# Altium PCB PCB1.PcbDoc
Units mil, origin at the board's own origin, x right, y up, seen from the top; angles counter-clockwise.
Board outline 3325 x 1920 mil, 2 copper layers (Top Layer, Bottom Layer); 20 components, 20 nets, 60 pads, 0 vias.
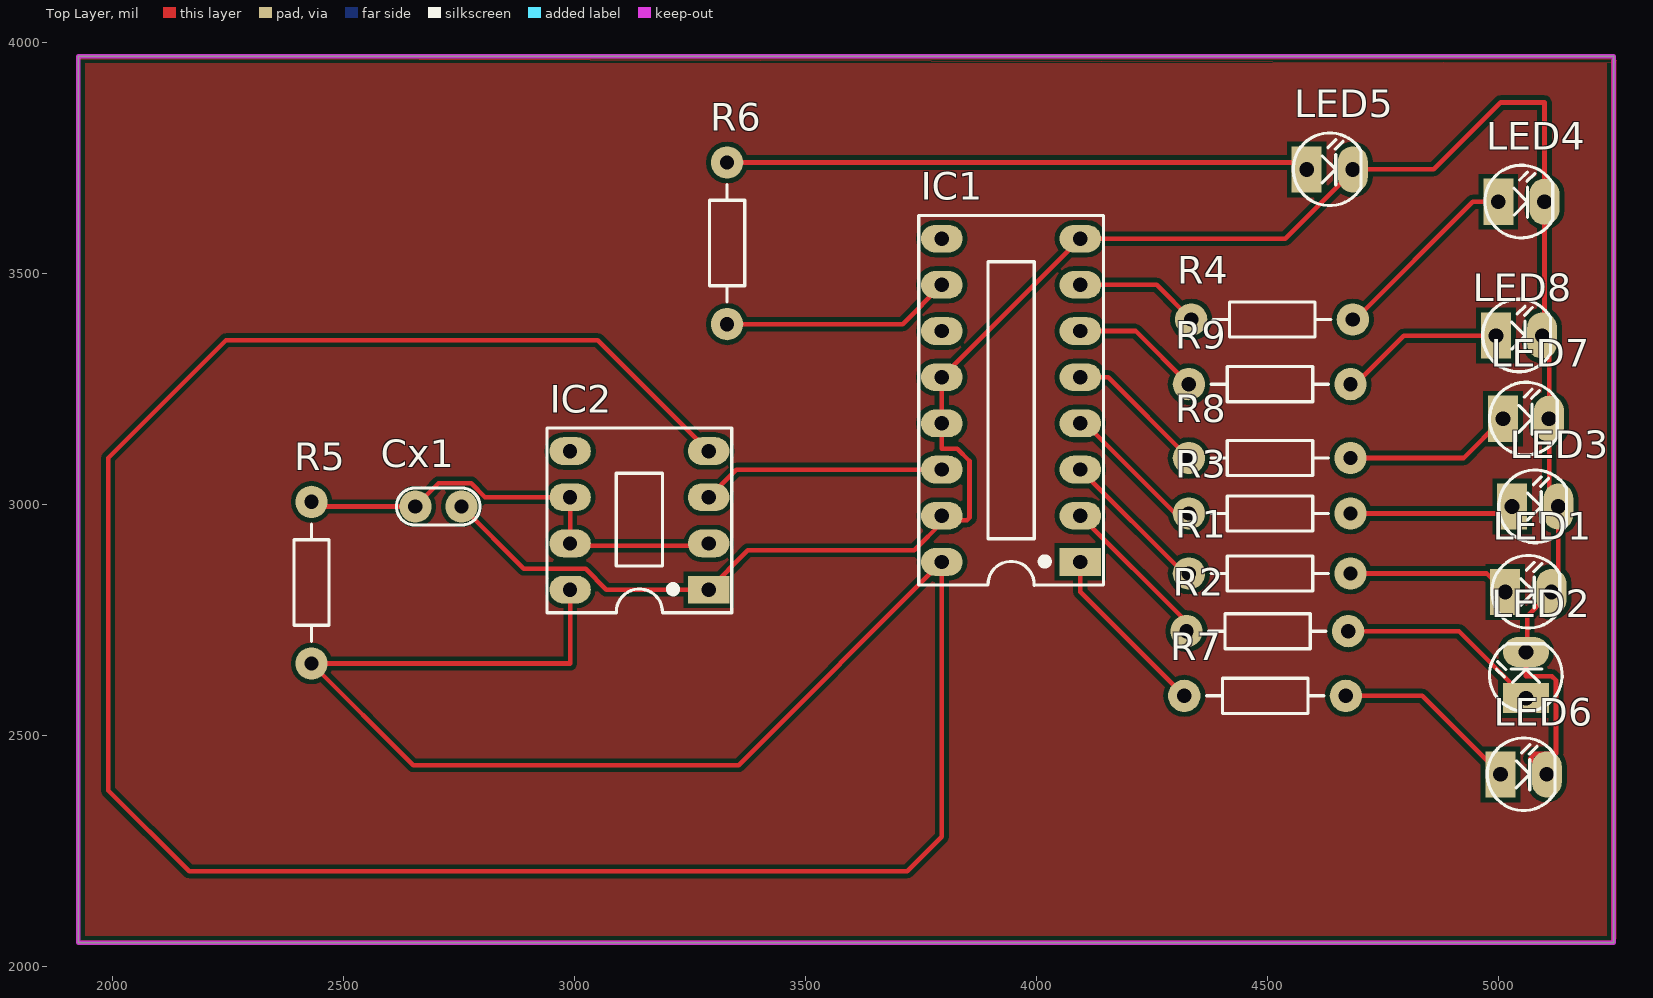
[diagram p0: Top Layer view]
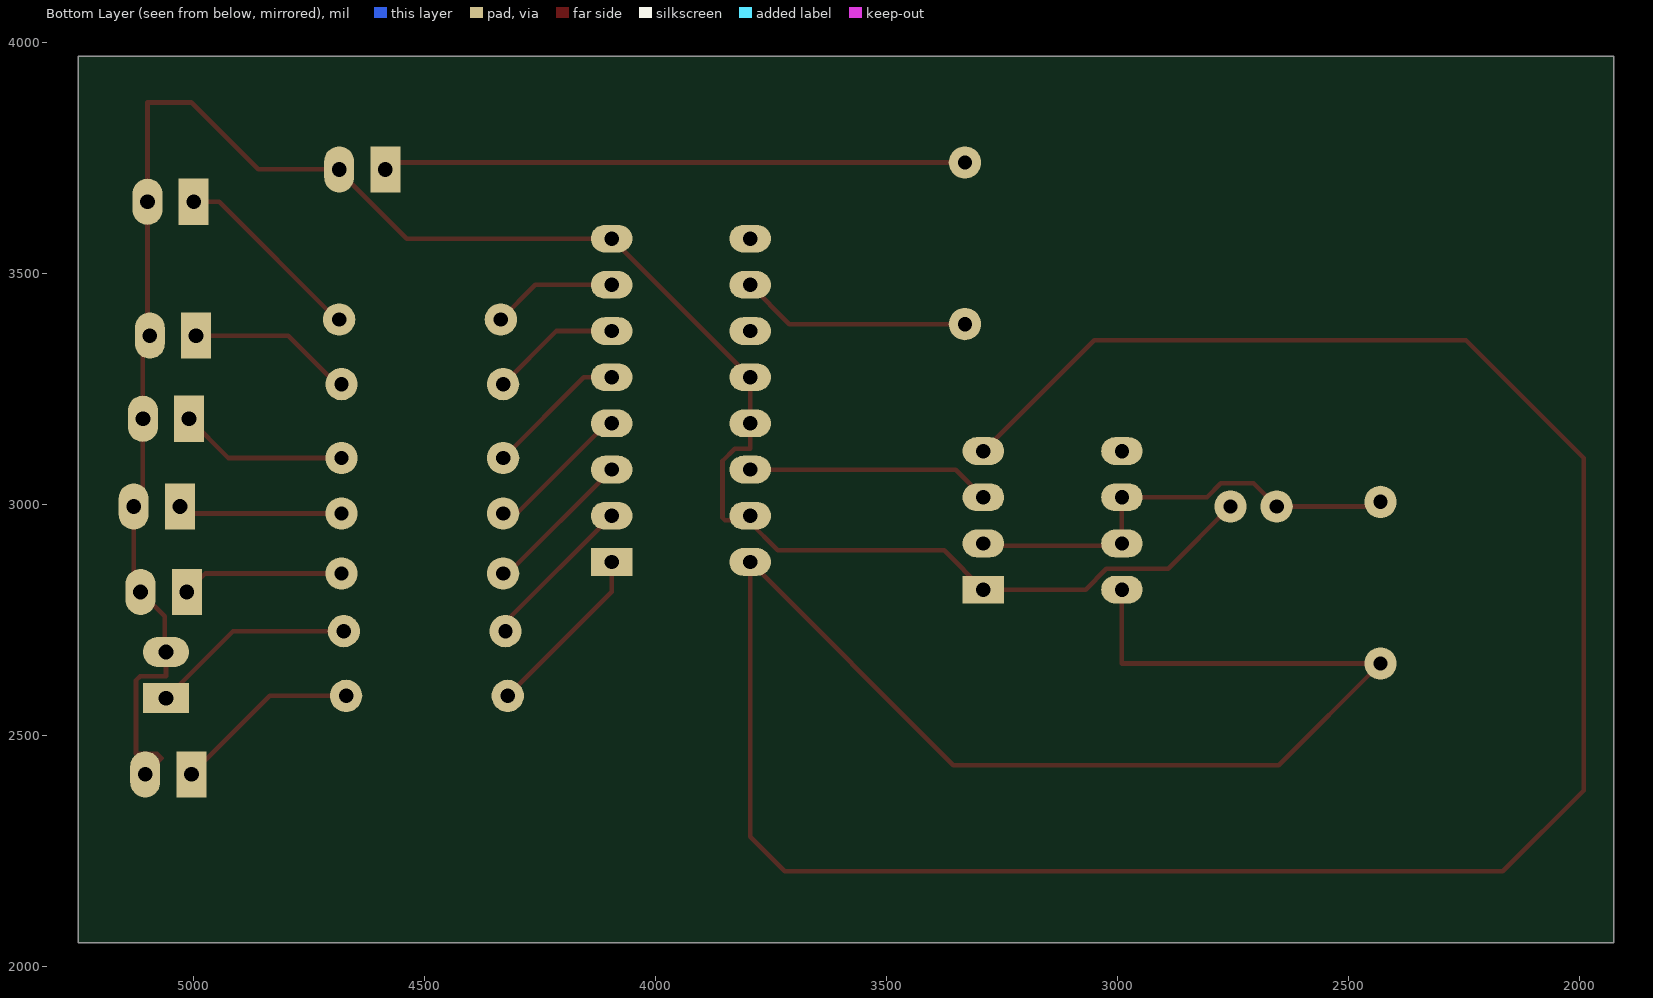
[diagram p1: Bottom Layer view, seen from below]
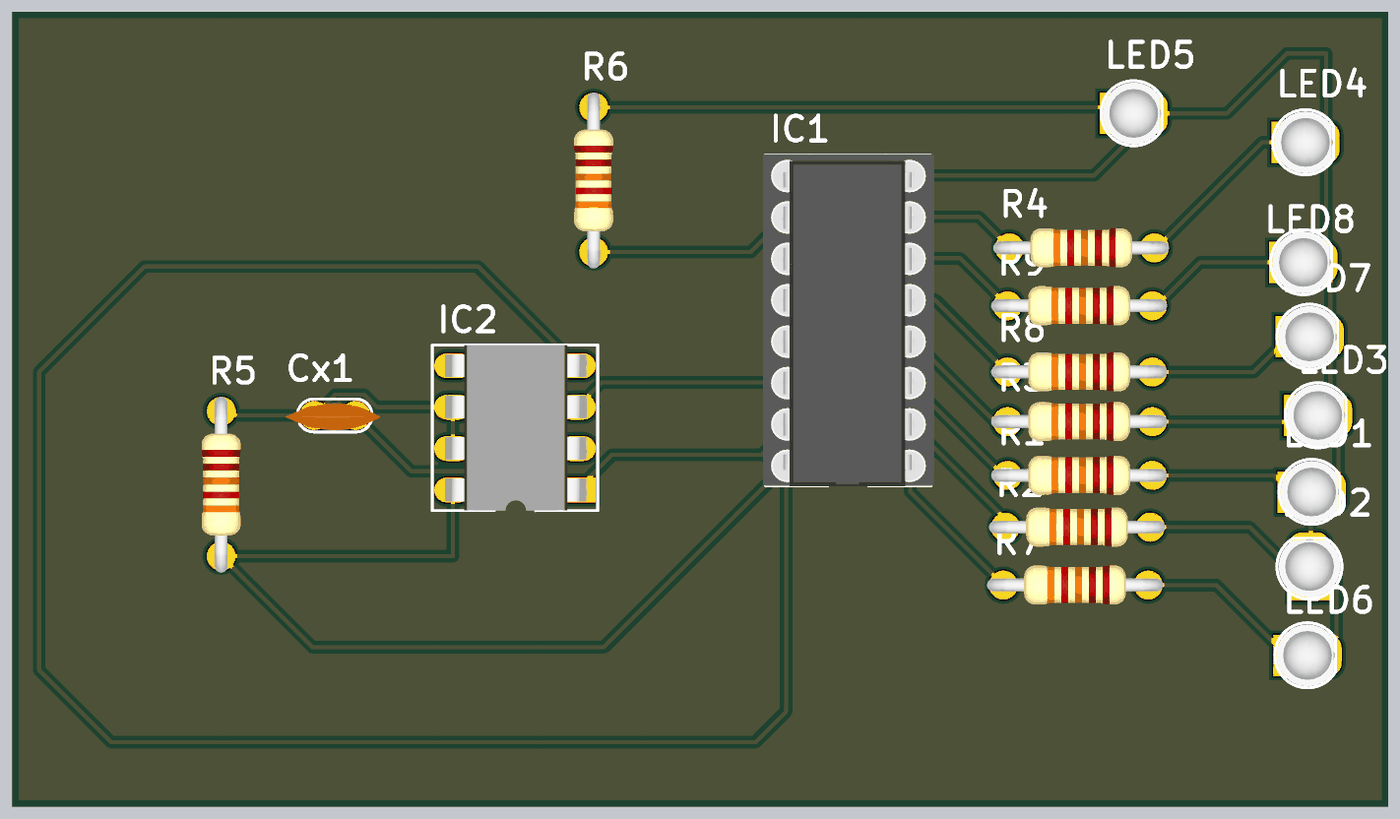
[diagram p2: 3D render of the assembled board from above, using the file's embedded part models]

## Layer stack, top to bottom
Top Solder: solder mask 0.4, Solder Resist, Dk 3.5
Top Layer: signal copper 1.4
Dielectric 1: dielectric 12.6, FR-4, Dk 4.8
Bottom Layer: signal copper 1.4
Bottom Solder: solder mask 0.4, Solder Resist, Dk 3.5

## Board outline
1925,2050 5250,2050 5250,3970 1925,3970

## Design rules (kind name [scope] priority, off if disabled: settings)
Clearance [All] p1: gap=10 ignorepadtopadclearanceinfootprint=FALSE except(0: Arc-Hole Track-Hole SMDPad-Hole THPad-Hole Via-Hole Fill-Hole Poly-Hole Region-Hole Text-Hole)
PolygonConnect [All] p1: connectstyle=Relief reliefconductorwidth=10 reliefentries=4 polygonreliefangle="90 Angle" airgapwidth=10
RoomDefinition Sheet1 [InComponentClass('Sheet1')] p1: confinementstyle=ConfineIn formatcopy=TRUE lockcomponents=FALSE outline 1925,2050 5250,2050 5250,3970 1925,3970
RoutingVias [All] p1: holewidth=28 width=50 viastyle="Through Hole" minholewidth=28 minwidth=50 maxholewidth=28 maxwidth=50
SolderMaskExpansion [All] p1: expansion=4
Width [All] p1: maxlimit=10 minlimit=10 preferedwidth=10
30 further rules are at their usual default settings.

## Components (designator, comment, footprint, x,y, rotation, side; value= is the part's Value field where it differs from the comment)
Cx1 "pF" CN1 2755,2995 r180 top value=33pF
IC1 "4017" DIP16/W0.3 4095,2875 r90 top value=CD4017
IC2 "LM555" DIP8/W0.3 3290,2815 r90 top
LED1 "LED" LED-3 5015,2810 r0 top value="LED 3 ly Single Colour"
LED2 "LED" LED-3 5060,2580 r90 top value="LED 3 ly Single Colour"
LED3 "LED" LED-3 5030,2995 r0 top value="LED 3 ly Single Colour"
LED4 "LED" LED-3 5000,3655 r0 top value="LED 3 ly Single Colour"
LED5 "LED" LED-3 4585,3725 r0 top value="LED 3 ly Single Colour"
LED6 "LED" LED-3 5005,2415 r0 top value="LED 3 ly Single Colour"
LED7 "LED" LED-3 5010,3185 r0 top value="LED 3 ly Single Colour"
LED8 "LED" LED-3 4995,3365 r0 top value="LED 3 ly Single Colour"
R1 "1k" R1/4W 4330,2850 r0 top value="R1/4W - 1K"
R2 "1k" R1/4W 4325,2725 r0 top value="R1/4W - 1K"
R3 "1k" R1/4W 4330,2980 r0 top value="R1/4W - 1K"
R4 "1k" R1/4W 4335,3400 r0 top value="R1/4W - 1K"
R5 "1k" R1/4W 2430,2655 r90 top value="R1/4W - 1K"
R6 "1k" R1/4W 3330,3390 r90 top value="R1/4W - 1K"
R7 "1k" R1/4W 4320,2585 r0 top value="R1/4W - 1K"
R8 "1k" R1/4W 4330,3100 r0 top value="R1/4W - 1K"
R9 "1k" R1/4W 4330,3260 r0 top value="R1/4W - 1K"

## Footprints (in the part's own frame and the unit in brackets; to place one, negate y for a bottom-side part, rotate by r counter-clockwise, add the part's x,y. Pads: shape width x height; smd on the part's side, far side on the other; paste and mask are expansions set on the pad)
CN1 [mil]
  round 70 hole 31: 1(0,0) 2(100,0)
  silkscreen extent -40,-40 141,40, body extent -60,-30 170,37, height 265
DIP8/W0.3 [mil] "8 PIN, W 300mil, Pin to pin 100mil"
  rect 60x90 hole 31: 1(0,0)
  oval 60x90 hole 31: 2(100,0) 3(200,0) 4(300,0) 5(300,300) 6(200,300) 7(100,300) 8(0,300)
  silkscreen extent -50,-50 350,350, body extent -50,-40 350,336, height 201
DIP16/W0.3 [mil] "16 PIN, W 300mil, Pin to pin 100mil"
  rect 60x90 hole 31: 1(0,0)
  oval 60x90 hole 31: 2(100,0) 3(200,0) 4(300,0) 5(400,0) 6(500,0) 7(600,0) 8(700,0) 9(700,300) 10(600,300) 11(500,300) 12(400,300) 13(300,300) 14(200,300) 15(100,300) 16(0,300)
  silkscreen extent -50,-50 750,350, body extent -52,-57 752,356, height 299
LED-3 [mil] "LED 2 PIN, 3ly Only colour"
  rect 65x100 hole 32: 1(0,0)
  oval 65x100 hole 32: 2(100,0)
  silkscreen extent -29,-78 118,79, body extent -25,-75 113,75, height 217
R1/4W [mil] "R 1/4W, 2 Pin, 350mil"
  round 70 hole 31: 1(0,0) 2(350,0)
  silkscreen extent 48,-38 302,38, body extent -40,-47 386,47, height 111

## Part data
Cx1: library part CN0, "Cremic For Xtal 1pF => 100pF"
IC1: "Decade Counter/Divider with 10 Decoded Outputs", Designed by=VanDungEvn
IC2: "Timer"
LED1 LED2 LED3 LED4 LED5 LED6 LED7 LED8: "LED Single colour Green and Red"
R1 R2 R3 R4 R5 R6 R7 R8 R9: library part R1/4W, "Resistor 1/4W"

## Nets (pads, with @x,y where several pads share a name; then routed paths per layer and width w, separated by ;. In a path a pad name is that pad's centre, name@x,y a point inside that pad or via, vN(x,y) a via of type N, cw(c..) or ccw(c..) an arc to the next point about the centre after c; other vN are vias at no path point)
GND: Cx1.1 IC1.8 IC1.12 IC1.13 IC1.15 IC2.1 LED1.2 LED2.2 LED3.2 LED4.2 LED5.2 LED6.2 LED7.2 LED8.2 | length 4779.8
  Top Layer w10: Cx1.1@2760,3000 Cx1.1 2890,2860 3023.64,2860 3068.64,2815 IC2.1 3375,2900 3735,2900 3797.5,2962.5 3795,2965 3849.5,2965 3855,2970.5 3855,3093.64 3828.64,3120 3795,3120 IC1.13 IC1.12 IC1.8 4538.71,3575 4685,3721.29 LED5.2 4859.99,3724.99 5005,3870 5100,3870 LED4.2 5100,3370 LED8.2 5110,3350 LED7.2 5110,3015 LED3.2 5130,2825 LED1.2 5062.5,2757.5 5062.5,2680 LED2.2 5060,2627.5 5116.21,2627.5 5125,2618.71 5125,2460 5079.47,2460 5069.73,2450.27 LED6.2
NetCx1_2: Cx1.2 IC2.2 IC2.6 IC2.7 R5.2 | length 1001.4
  Top Layer w10: R5.2 2440,2995 Cx1.2 2705,3045 2775.71,3045 2805.71,3015 IC2.6 IC2.7 2995,2910 3285,2910 IC2.2
NetIC1_1: IC1.1 R7.1 | length 393.2
  Top Layer w10: IC1.1@4095,2885 IC1.1 4095,2810 R7.1
NetIC1_2: IC1.2 R2.1 | length 345.3
  Top Layer w10: IC1.2 4325,2745 R2.1
NetIC1_3: IC1.3 R1.1 | length 328.2
  Top Layer w10: IC1.3 4320,2850 R1.1
NetIC1_4: IC1.4 R3.1 | length 315.8
  Top Layer w10: IC1.4 4105,3175 4300,2980 R3.1
NetIC1_5: IC1.5 R8.1 | length 307.5
  Top Layer w10: IC1.5 4155,3275 R8.1
NetIC1_6: IC1.6 R9.1 | length 282.6
  Top Layer w10: IC1.6 4215,3375 R9.1
NetIC1_7: IC1.7 R4.1 | length 271.1
  Top Layer w10: IC1.7 4260,3475 R4.1
NetIC1_10: IC1.10 R6.1 | length 500.2
  Top Layer w10: R6.1 3710,3390 IC1.10
NetIC1_14: IC1.14 IC2.3 | length 529.9
  Top Layer w10: IC2.3 3350,3075 IC1.14
NetLED1_1: LED1.1 R1.2 | length 351.6
  Top Layer w10: R1.2 4975,2850 LED1.1
NetLED2_1: LED2.1 R2.2 | length 445.1
  Top Layer w10: R2.2 4915,2725 LED2.1
NetLED3_1: LED3.1 R3.2 | length 356.2
  Top Layer w10: R3.2 5015,2980 LED3.1
NetLED4_1: LED4.1 R4.2 | length 420.6
  Top Layer w10: R4.2 4690,3400 4945,3655 LED4.1
NetLED5_1: LED5.1 R6.2 | length 1261.2
  Top Layer w10: R6.2 4570,3740 LED5.1
NetLED6_1: LED6.1 R7.2 | length 405.4
  Top Layer w10: R7.2 4835,2585 LED6.1
NetLED7_1: LED7.1 R8.2 | length 365.2
  Top Layer w10: R8.2 4925,3100 LED7.1
NetLED8_1: LED8.1 R9.2 | length 358.5
  Top Layer w10: R9.2 4690,3260 4795,3365 LED8.1
VCC: IC1.16 IC2.4 IC2.8 R5.1 | length 7087
  Top Layer w10: IC2.8 2990,2655 R5.1 2650,2435 3355,2435 IC1.16 3795,2280 3720,2205 2165,2205 1990,2380 1990,3100 2245,3355 3050,3355 IC2.4
pads on no net: IC1.9 IC1.11 IC2.5

## Polygon pours and split planes (outlines as drawn)
no net on Top Layer (solid, pour order 16): 1925,3970
no net on Top Layer (solid, pour order 14): 1940,3960 1935,3960 1930,3965 5240,3965 5245,3960 5245,2060 5250,2055 1935,2055 1925,2065
no net on Top Layer (solid, pour order 12): 1925,3965 1925,3970 1930,3965 5250,3965 5245,3960 5245,2050 1925,2050 1930,2055 5250,2055 5255,2060 5255,3960 5250,3955

## Keep-outs
Top Layer:
  the board outline again, w10